# Altium PCB PCB_Board1_Lines_v1.PcbDoc
Units mm, origin at the board's own origin, x right, y up, seen from the top; angles counter-clockwise.
Board outline 152.4 x 101.6 mm, 2 copper layers (Top Layer, Bottom Layer), stack 0.325 mm thick; 20 components, 0 nets, 2 pads, 12 vias.
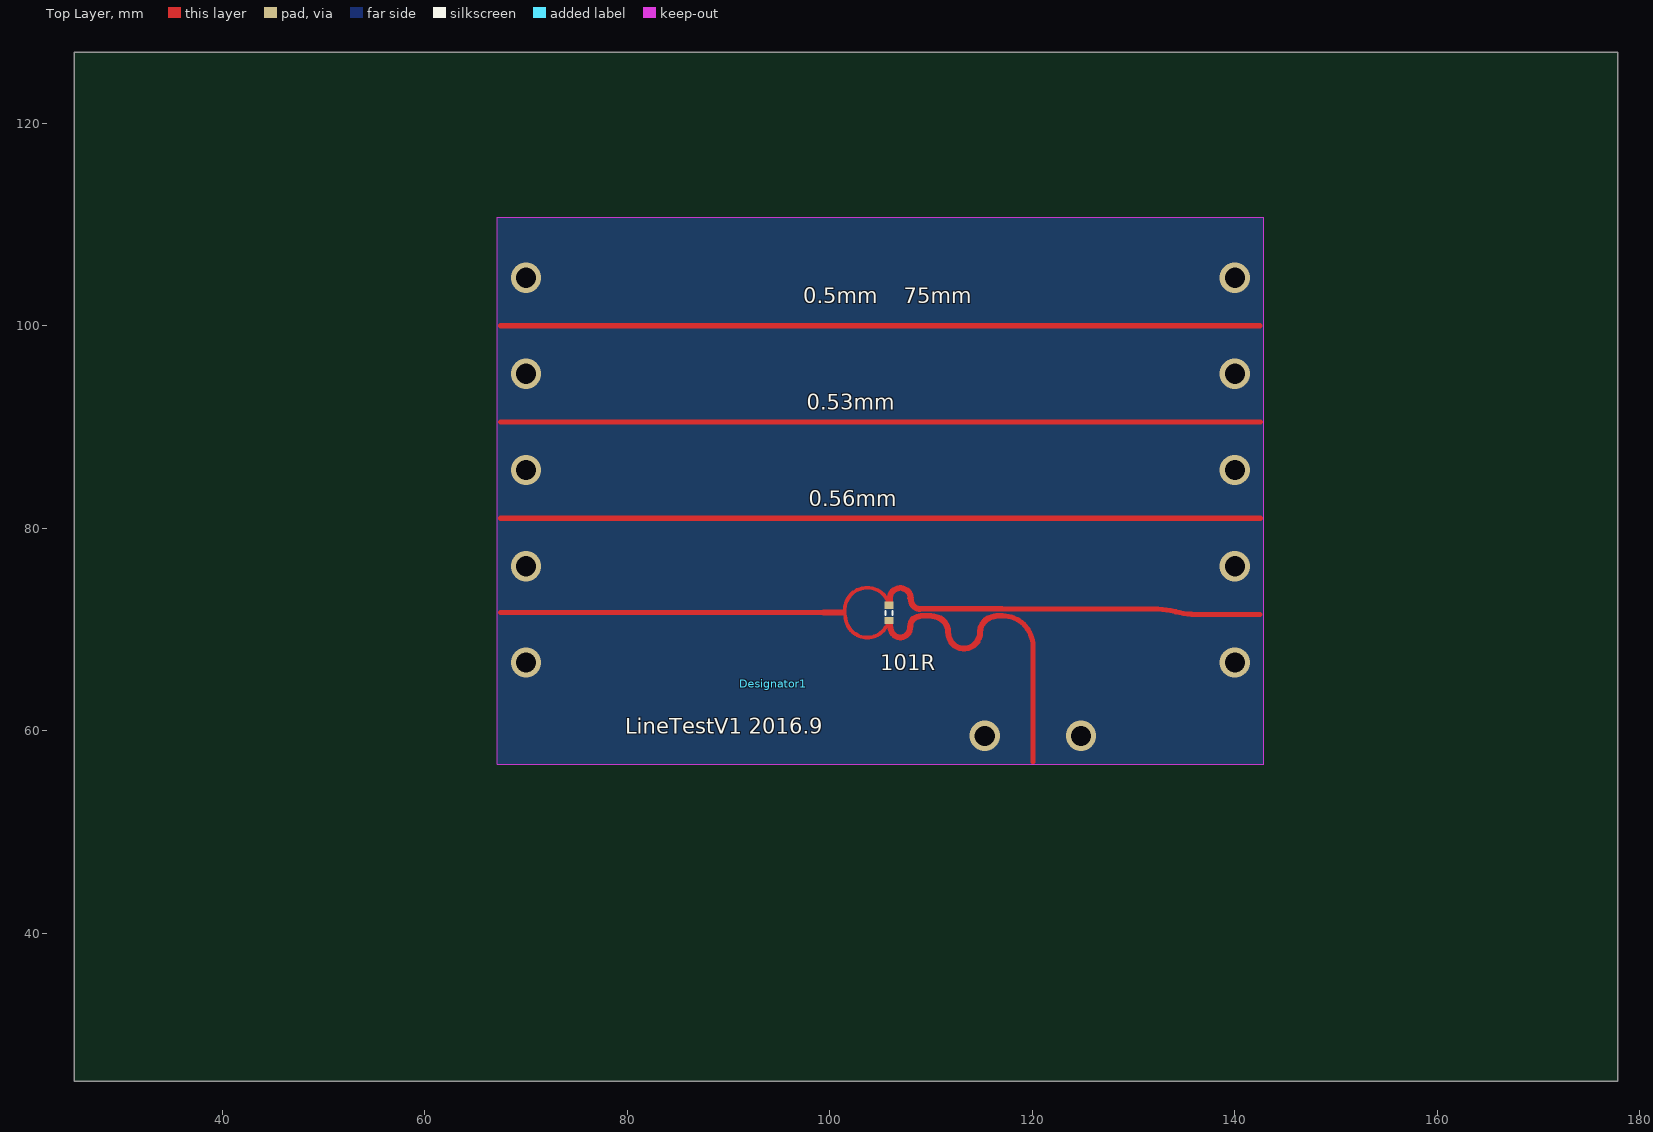
[diagram p0: Top Layer view]
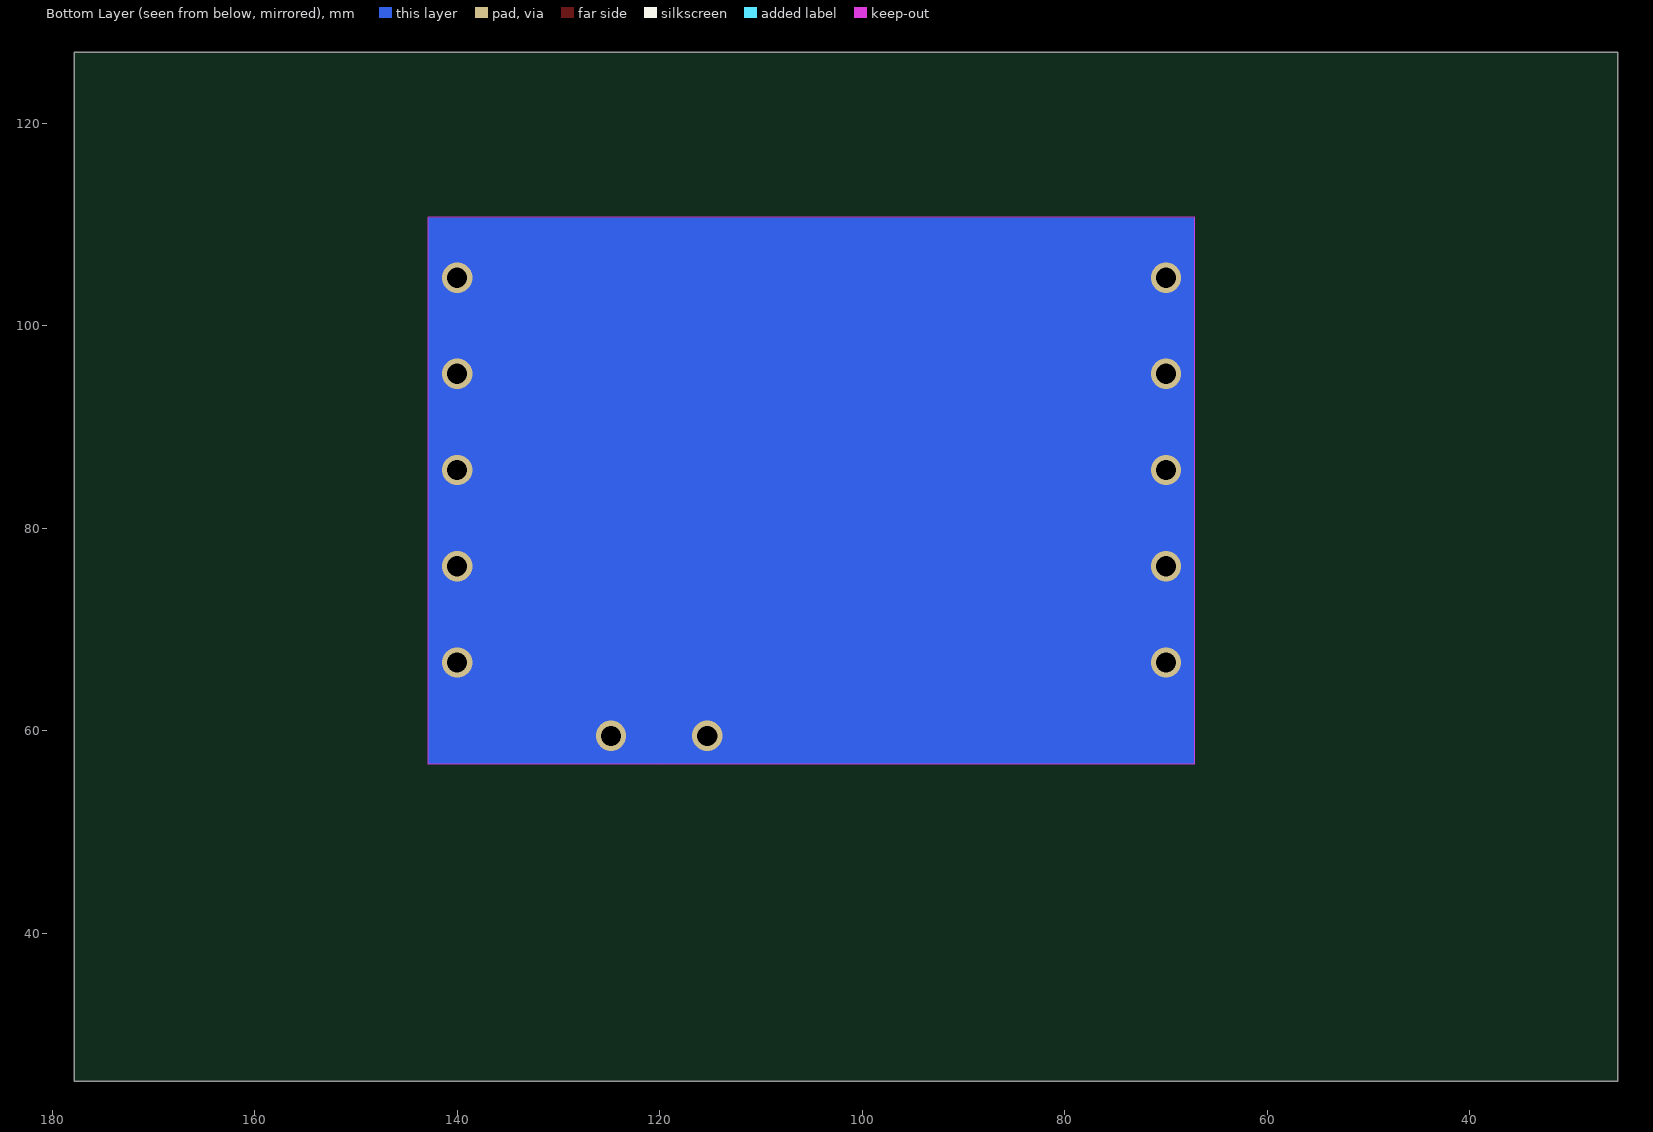
[diagram p1: Bottom Layer view, seen from below]

## Layer stack, top to bottom
Top Layer: signal copper 0.0356
Dielectric: core 0.254, RO4350B, Dk 3.66
Bottom Layer: signal copper 0.0356

## Board outline
25.4,25.4 177.8,25.4 177.8,127 25.4,127

## Design rules (kind name [scope] priority, off if disabled: settings)
Clearance [All] p1: gap=0.254
PolygonConnect [All] p1: connectstyle=Relief reliefconductorwidth=0.254 reliefentries=4 polygonreliefangle="90 Angle" airgapwidth=0.254
RoutingVias [All] p1: holewidth=0.711 width=1.27 viastyle="Through Hole" minholewidth=0.711 minwidth=1.27 maxholewidth=0.711 maxwidth=1.27
SolderMaskExpansion [All] p1: expansion=0.102
Width [All] p1: maxlimit=0.254 minlimit=0.254 preferedwidth=0.254
28 further rules are at their usual default settings.

## Components (designator, comment, footprint, x,y, rotation, side; value= is the part's Value field where it differs from the comment)
101R "Comment" J1-0603 105.85,71.65 r90 top
Designator1 "Comment" divider_circle_end_3_0.5_ads_tlines__MCURVE__layout_Curve8_ 0.254,3.865 r270 top
Designator1 "Comment" divider_circle_end_3_0.5_ads_tlines__MCURVE__layout_Curve14_ 4.723,2.693 r270 top
Designator1 "Comment" divider_circle_end_3_0.5_ads_tlines__MCURVE__layout_Curve4_ 0.254,4.396 r90 top
Designator1 "Comment" divider_circle_end_3_0.5_ads_tlines__MCURVE__layout_Curve11_ 6.723,5.48 r270 top
Designator1 "Comment" divider_circle_end_3_0.5_ads_tlines__MCURVE__layout_Curve13_ 6.723,5.568 r90 top
Designator1 "Comment" divider_circle_end_3_0.5_ads_tlines__MCURVE__layout_Curve12_ 7.723,3.78 r180 top
Designator1 "Comment" divider_circle_end_3_0.5_ads_tlines__MCURVE__layout_Curve15_ 15.217,3.78 r180 top
Designator1 "Comment" divider_circle_end_3_0.5_ads_tlines__MCURVE__layout_Curve16_ 10.417,2.18 r270 top
Designator1 "Comment" divider_circle_end_3_0.5_ads_tlines__MCURVE__layout_Curve17_ 10.417,2.18 r90 top
Designator1 "Comment" DIVIDER_CIRCLE_END_3_0_5_7 7.098,6.797 r270 top
Designator1 "Comment" DIVIDER_CIRCLE_END_3_0_5_6 11.567,5.625 r270 top
Designator1 "Comment" DIVIDER_CIRCLE_END_3_0_5_5 7.098,7.328 r90 top
Designator1 "Comment" DIVIDER_CIRCLE_END_3_0_5_4 13.567,8.412 r270 top
Designator1 "Comment" DIVIDER_CIRCLE_END_3_0_5_3 13.567,8.5 r90 top
Designator1 "Comment" DIVIDER_CIRCLE_END_3_0_5_2 14.567,6.712 r180 top
Designator1 "Comment" DIVIDER_CIRCLE_END_3_0_5_1 22.061,6.712 r180 top
Designator1 "Comment" DIVIDER_CIRCLE_END_3_0_5_0 17.261,5.112 r270 top
Designator1 "Comment" DIVIDER_CIRCLE_END_3_0_5_A 17.261,5.112 r90 top
Designator1 "Comment" *U10 94.4,64.63 r0 top

## Footprints (in the part's own frame and the unit in brackets; to place one, negate y for a bottom-side part, rotate by r counter-clockwise, add the part's x,y. Pads: shape width x height; smd on the part's side, far side on the other; paste and mask are expansions set on the pad)
*U10 [mm]
  Top Layer drawing of 1466 lines, arcs and shapes, not listed
divider_circle_end_3_0.5_ads_tlines__MCURVE__layout_Curve4_ [mm]
divider_circle_end_3_0.5_ads_tlines__MCURVE__layout_Curve8_ [mm]
divider_circle_end_3_0.5_ads_tlines__MCURVE__layout_Curve11_ [mm]
divider_circle_end_3_0.5_ads_tlines__MCURVE__layout_Curve12_ [mm]
divider_circle_end_3_0.5_ads_tlines__MCURVE__layout_Curve13_ [mm]
divider_circle_end_3_0.5_ads_tlines__MCURVE__layout_Curve14_ [mm]
divider_circle_end_3_0.5_ads_tlines__MCURVE__layout_Curve15_ [mm]
divider_circle_end_3_0.5_ads_tlines__MCURVE__layout_Curve16_ [mm]
divider_circle_end_3_0.5_ads_tlines__MCURVE__layout_Curve17_ [mm]
DIVIDER_CIRCLE_END_3_0_5_0 [mm]
DIVIDER_CIRCLE_END_3_0_5_1 [mm]
DIVIDER_CIRCLE_END_3_0_5_2 [mm]
DIVIDER_CIRCLE_END_3_0_5_3 [mm]
DIVIDER_CIRCLE_END_3_0_5_4 [mm]
DIVIDER_CIRCLE_END_3_0_5_5 [mm]
DIVIDER_CIRCLE_END_3_0_5_6 [mm]
DIVIDER_CIRCLE_END_3_0_5_7 [mm]
DIVIDER_CIRCLE_END_3_0_5_A [mm]
J1-0603 [mm] "Chip Resistor, Body 1.6x0.8mm, IPC High Density"
  rect 0.7x0.9 smd: 1(-0.75,0) 2(0.75,0)
  silkscreen extent -0.2,-0.35 0.2,0.35, body extent -0.85,-0.48 0.85,0.48, height 0.9

## Via types
v1: diameter 3, hole 2, Top Layer to Bottom Layer, 12 vias

## Nets (pads, with @x,y where several pads share a name; then routed paths per layer and width w, separated by ;. In a path a pad name is that pad's centre, name@x,y a point inside that pad or via, vN(x,y) a via of type N, cw(c..) or ccw(c..) an arc to the next point about the centre after c; other vN are vias at no path point)
pads on no net: 101R.1 101R.2
copper on no net: | length 306.3
  Top Layer w0.254: 91.6,71.7 91.7,71.8
  Top Layer w0.5: 67.5,71.7 100,71.7 ; 67.5,100 142.5,100 ; 110,72.04 132,72.04 cw(c132,64.04) 134.071,71.767 ; 117.061,71.362 cw(c117.061,68.363) 120.06,68.363 120.06,56.94 ; 134.159,71.756 ccw(c136.1,79) 136.1,71.5 ; 136,71.5 142.5,71.5
  Top Layer w0.53: 67.5,90.5 142.5,90.5
  Top Layer w0.56: 67.5,81 142.5,81
  other v1: 115.31,59.5 124.81,59.5 70,66.75 140,66.75 70,76.25 140,76.25 70,85.75 140,85.75 70,95.25 140,95.25 70,104.75 140,104.75

## Keep-outs
Keep-Out Layer:
  lines w0.025: 67.15,56.7 142.85,56.7 142.85,110.7 67.15,110.7 67.15,56.7

## Other copper
Top Layer:
  rectangle: 105.486,70.395 106.217,70.7
  rectangle: 105.486,72.7 106.217,72.99
Bottom Layer:
  rectangle: 67.15,56.7 142.85,110.7

## Silkscreen, mask and mechanical layers (free items; w line width, h text height)
Top Overlay:
  text "0.5mm    75mm" at 97.4,102.2 h1.52
  text "0.53mm" at 97.7,91.7 h1.52
  text "0.56mm" at 97.9,82.2 h1.52
  text "LineTestV1 2016.9" at 79.8,59.7 h1.52